# Altium PCB tarjeta v2.PcbDoc
Units mil, origin at the board's own origin, x right, y up, seen from the top; angles counter-clockwise.
Board outline 3450 x 3100 mil, 2 copper layers (Top Layer, Bottom Layer); 49 components, 32 nets, 143 pads, 0 vias.
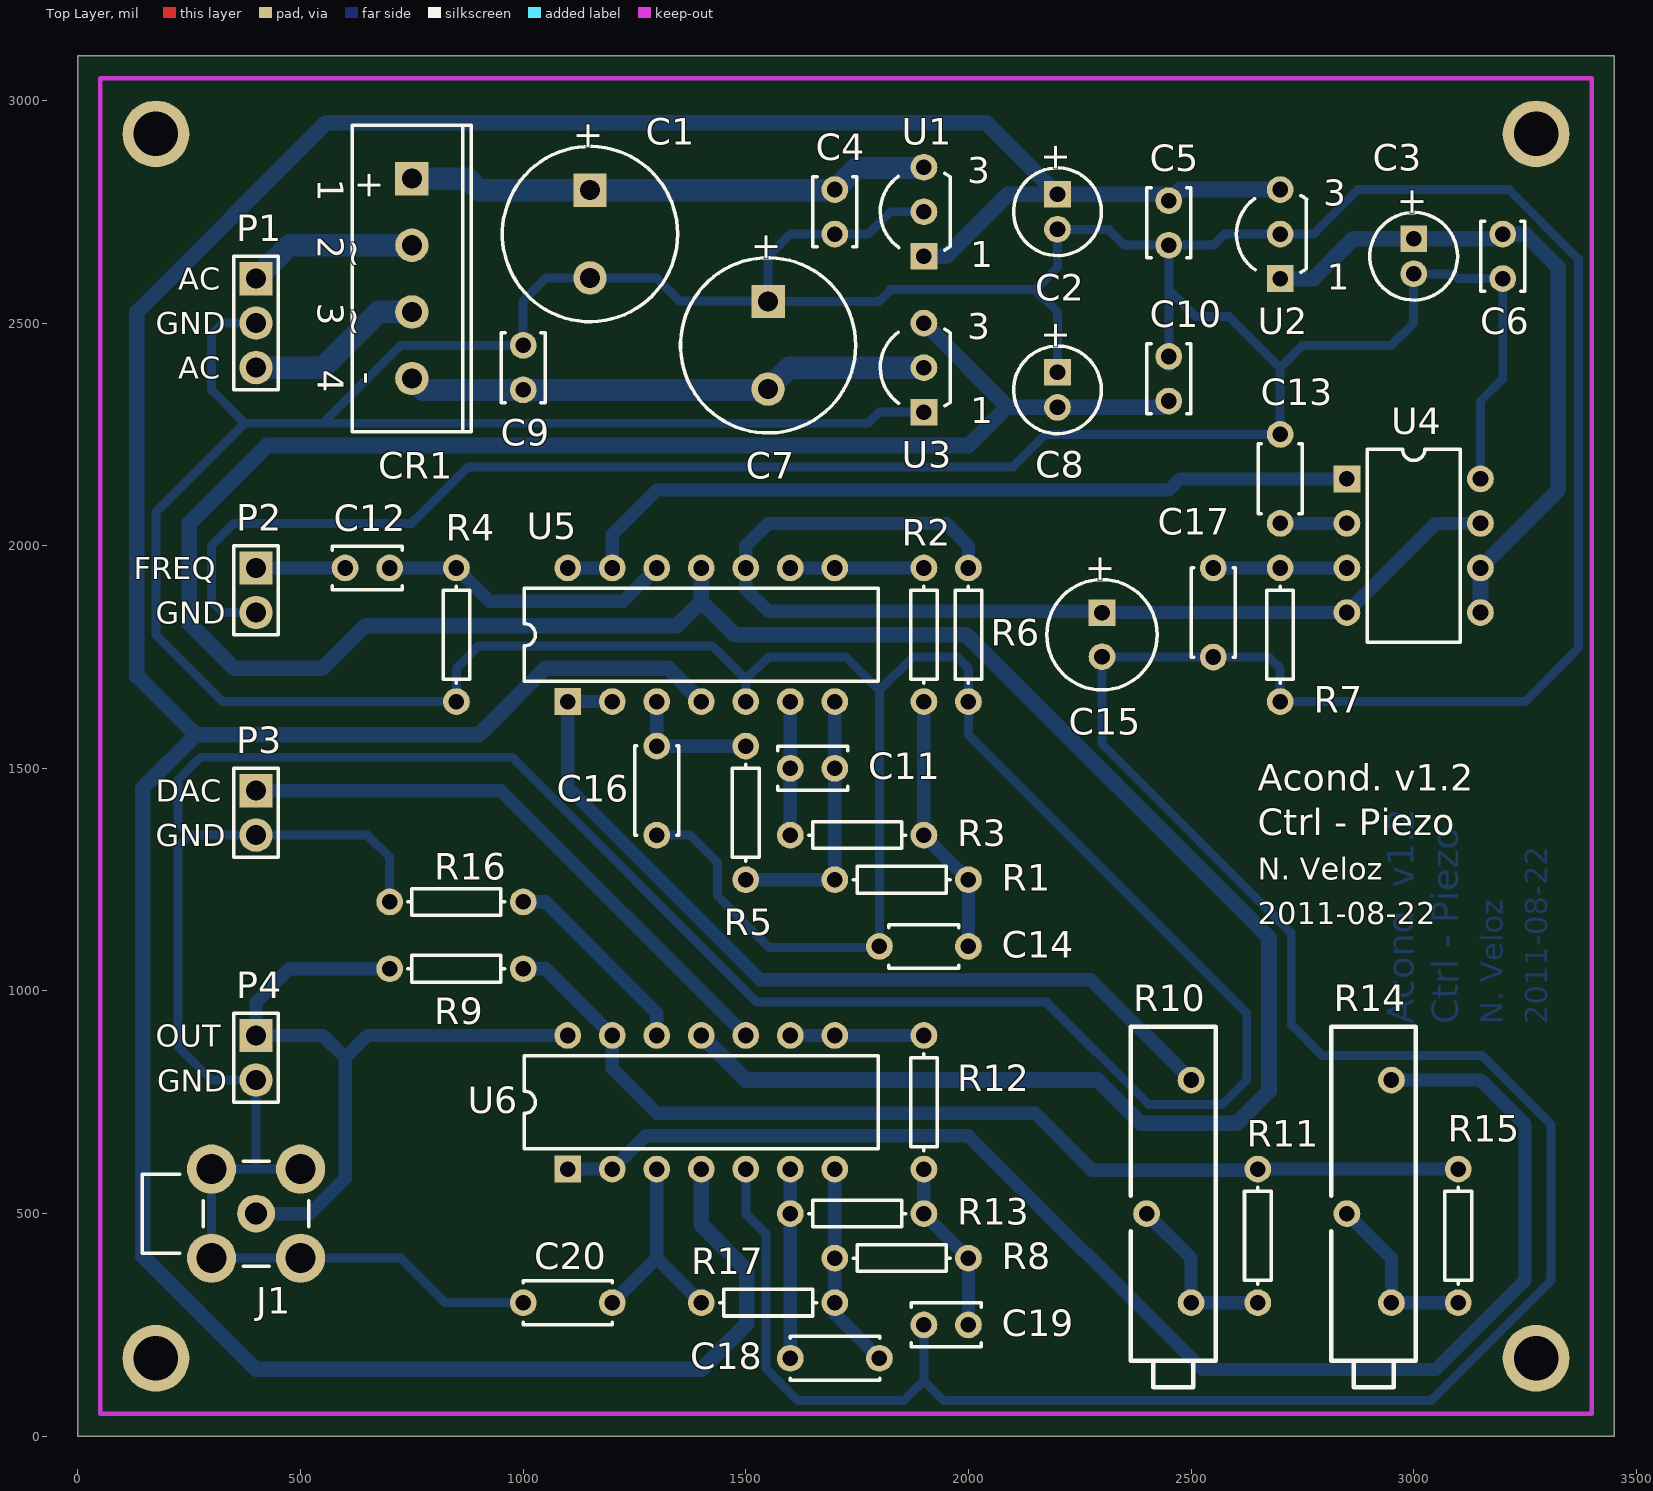
[diagram p0: Top Layer view]
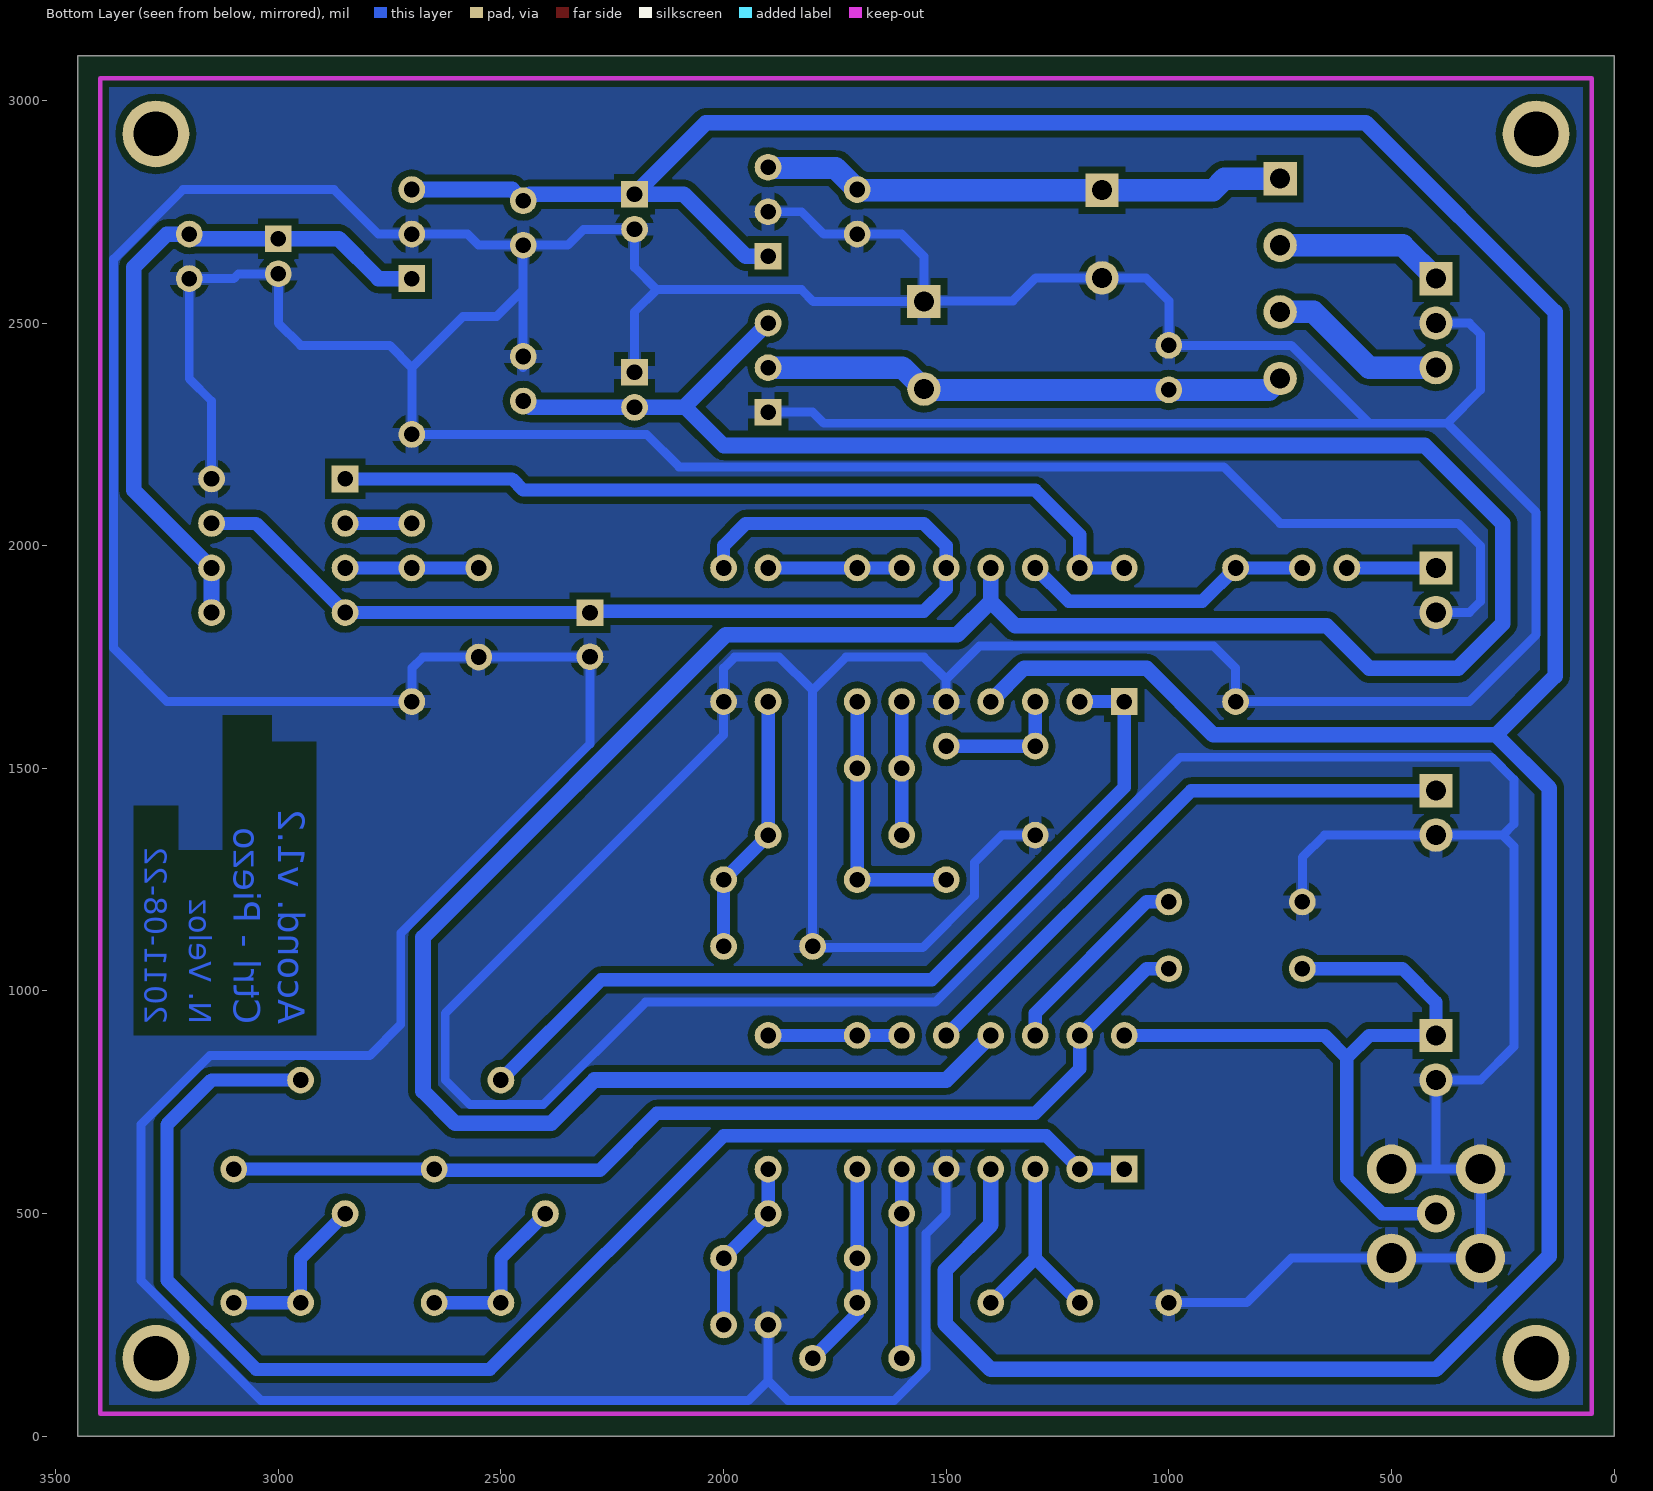
[diagram p1: Bottom Layer view, seen from below]

## Layer stack, top to bottom
Top Layer: signal copper 1.4
Dielectric: dielectric 12.6, FR-4, Dk 4.8
Bottom Layer: signal copper 1.4

## Board outline
3450,3100 0,3100 0,0 3450,0

## Design rules (kind name [scope] priority, off if disabled: settings)
Clearance Clearance_GND [InNet('GND')] p1: gap=15
Clearance [All] p2: gap=20
HoleSize [All] p1: absolutevalues=TRUE maxlimit=100 minlimit=35 maxpercent=80.000 minpercent=20.000
MinimumAnnularRing [All] p1: minimumring=12
PlaneClearance [All] p1: clearance=15
PlaneConnect [All] p1: planeconnectstyle=Relief reliefexpansion=20 reliefentries=4 reliefconductorwidth=30 reliefairgap=10
PolygonConnect [All] p1: connectstyle=Relief reliefconductorwidth=30 reliefentries=4 polygonreliefangle="90 Angle"
RoomDefinition esquematico [InComponentClass('esquematico')] p1: confinementstyle=ConfineIn formatcopy=TRUE lockcomponents=FALSE outline 50,50 3400,50 3400,3050 50,3050
RoutingLayers [All] p1: top layer_v5=FALSE bottom layer_v5=TRUE
RoutingVias [All] p1: holewidth=28 width=50 viastyle="Through Hole" minholewidth=28 minwidth=50 maxholewidth=28 maxwidth=50
SilkscreenOverComponentPads [All] p1: minsilkscreentomaskgap=5
SolderMaskExpansion [All] p1: expansion=4
TestPointUsage [All] p1: valid=0 allowmultiple=FALSE
Testpoint [All] p1: side=15 testpointundercomponent=TRUE minsize=40 maxsize=100 preferedsize=60 minholesize=0 maxholesize=40 preferedholesize=32 testpointgrid=1 style=1023 order=0123456789
Width Width_Power [InNetClass('PowerNets')] p1: maxlimit=35 minlimit=35 preferedwidth=35
Width Width_GND [InNet('GND')] p2: maxlimit=20 minlimit=10 preferedwidth=10
Width Width_HV [InNetClass('HighVoltageNets')] p3: maxlimit=50 minlimit=50 preferedwidth=50
Width [All] p4: maxlimit=30 minlimit=30 preferedwidth=30
19 further rules are at their usual default settings.

## Classes and differential pairs
net class GNDNet: GND
net class HighVoltageNets: NetC1_1 NetC7_2 NetCR1_2 NetCR1_3
net class PowerNets: +5V +12V -12V

## Components (designator, comment, footprint, x,y, rotation, side; value= is the part's Value field where it differs from the comment)
C1 "Cap Pol1" CAPPR5-10x20/H1.1 1150,2700 r270 top
C2 "Cap Pol1" CAPPR2-5x11 2200,2750 r270 top
C3 "Cap Pol1" CAPPR2-5x11 3000,2650 r270 top
C4 "Cap" CAPR2.54-4x2.5 1700,2750 r270 top
C5 "Cap" CAPR2.54-4x2.5 2450,2725 r270 top
C6 "Cap" CAPR2.54-4x2.5 3200,2650 r270 top
C7 "Cap Pol1" CAPPR5-10x20/H1.1 1550,2450 r270 top
C8 "Cap Pol1" CAPPR2-5x11 2200,2350 r270 top
C9 "Cap" CAPR2.54-4x2.5 1000,2400 r90 top
C10 "Cap" CAPR2.54-4x2.5 2450,2375 r90 top
C11 "Cap" CAPR2.54-4x2.5 1650,1500 r180 top
C12 "Cap" CAPR2.54-4x2.5 650,1950 r180 top
C13 "Cap" CAPR5.08-4x2.5 2700,2150 r270 top
C14 "Cap" CAPR5.08-4x2.5 1900,1100 r180 top
C15 "Cap Pol1" CAPPR2.5-6.3x11 2300,1800 r270 top
C16 "Cap" CAPR5.08-5.1x2.5 1300,1450 r90 top
C17 "Cap" CAPR5.08-5.1x2.5 2550,1850 r90 top
C18 "Cap" CAPR5.08-5.1x2.5 1700,175 r180 top
C19 "Cap" CAPR2.54-4x2.5 1950,250 r180 top
C20 "Cap" CAPR5.08-5.1x2.5 1100,300 r0 top
CR1 "2KBP005" D-44 750,2600 r270 top
J1 "COAX-F" MCX5.08-H5 400,500 r0 top
P1 "Header 3" HDR1X3 400,2600 r270 top
P2 "Header 2" HDR1X2 400,1950 r270 top
P3 "Header 2" HDR1X2 400,1450 r270 top
P4 "Header 2" HDR1X2 400,900 r270 top
R1 "Res1" AXIAL-0.3 1850,1250 r180 top
R2 "Res1" AXIAL-0.3 1900,1800 r270 top
R3 "Res1" AXIAL-0.3 1750,1350 r180 top
R4 "Res1" AXIAL-0.3 850,1800 r90 top
R5 "Res1" AXIAL-0.3 1500,1400 r90 top
R6 "Res1" AXIAL-0.3 2000,1800 r90 top
R7 "Res1" AXIAL-0.3 2700,1800 r90 top
R8 "Res1" AXIAL-0.3 1850,400 r180 top
R9 "Res1" AXIAL-0.3 850,1050 r180 top
R10 "RTrimPot" 3006P 2500,300 r270 top
R11 "Res1" AXIAL-0.3 2650,450 r90 top
R12 "Res1" AXIAL-0.3 1900,750 r270 top
R13 "Res1" AXIAL-0.3 1750,500 r180 top
R14 "RTrimPot" 3006P 2950,300 r270 top
R15 "Res1" AXIAL-0.3 3100,450 r90 top
R16 "Res1" AXIAL-0.3 850,1200 r0 top
R17 "Res1" AXIAL-0.3 1550,300 r180 top
U1 "MC78L12ACP" BCY-W3/W 1900,2750 r0 top
U2 "MC78L05ACP" BCY-W3/W 2700,2700 r0 top
U3 "MC79L12ACP" BCY-W3/W 1900,2400 r0 top
U4 "LM2907P" P008 3000,2000 r270 top
U5 "TL084CN" DIP14 1400,1800 r0 top
U6 "TL084CN" DIP14 1400,750 r0 top

## Footprints (in the part's own frame and the unit in brackets; to place one, negate y for a bottom-side part, rotate by r counter-clockwise, add the part's x,y. Pads: shape width x height; smd on the part's side, far side on the other; paste and mask are expansions set on the pad)
3006P [mil] "Rectangular Trimming Potentiometer 3006P"
  round 60 hole 35: 1(-500,0) 2(-200,-100) 3(0,0)
  silkscreen extent -620,-135 190,55
AXIAL-0.3 [mil] "Resistor; 2 Leads"
  round 60 hole 35: 1(-150,0) 2(150,0)
  silkscreen extent -109,-30 109,30
BCY-W3/W [mil] "TO, Flat Index; 3 In-Line, Axial Leads (Wide Pitch); Body Dia. 4.7mm; Leads 0.56 x 0.51 mm (max)"
  rect 60x60 hole 35: 1(0,-100)
  round 60 hole 35: 2(0,0) 3(0,100)
  silkscreen extent -98,-86 59,86
CAPPR2-5x11 [mil] "Capacitor, Electrolytic, Radial; Body 5 x 11 mm (Dia.xH typ); Pin Spacing 2 mm (typ)"
  rect 60x60 hole 35: 1(-39.37,0)
  round 60 hole 35: 2(39.37,0)
  silkscreen extent -98,-98 98,98
CAPPR2.5-6.3x11 [mil] "Capacitor, Electrolytic, Radial; Body 6.3 x 11 mm (Dia.xH typ); Pin Spacing 2.5 mm (typ)"
  rect 60x60 hole 35: 1(-49.21,0)
  round 60 hole 35: 2(49.21,0)
  silkscreen extent -124,-124 124,124
CAPPR5-10x20/H1.1 [mil] "Capacitor, Electrolytic, Radial; Body 10 x 20 mm (Dia.xH typ); Pin Spacing 5 mm (typ)"
  rect 75x75 hole 45: 1(-98.43,0)
  round 75 hole 45: 2(98.43,0)
  silkscreen extent -197,-197 197,197
CAPR2.54-4x2.5 [mil] "Capacitor, Ceramic, Thru-Hole, Dipped Radial; Body 4 x 2.5 mm (WxT) Pin Spacing 2.54 mm (typ)"
  round 60 hole 35: 1(-50,0) 2(50,0)
  silkscreen extent -79,-49 79,49
CAPR5.08-4x2.5 [mil] "Capacitor, Ceramic, Thru-Hole, Dipped Radial; Body 4 x 2.5 mm (WxT) Pin Spacing 5.08 mm (typ)"
  round 60 hole 35: 1(-100,0) 2(100,0)
  silkscreen extent -79,-49 79,49
CAPR5.08-5.1x2.5 [mil] "Capacitor, Ceramic, Thru-Hole, Dipped Radial; Body 5.1 x 2.5 mm (WxT) Pin Spacing 5.08 mm (typ)"
  round 60 hole 35: 1(-100,0) 2(100,0)
  silkscreen extent -100,-49 100,49
D-44 [mil] "SIP; 4 Leads; Body 15 x 17.5 x 6.8 mm (typ); Pitch 3.8 mm"
  rect 75x75 hole 45: 1(-224.41,0)
  round 75 hole 45: 2(-74.8,0) 3(74.8,0) 4(224.41,0)
  silkscreen extent -344,-134 344,134
DIP14 [mil] "DIP; 14 Leads; Row Spacing 7.62 mm; Pitch 2.54 mm"
  rect 60x60 hole 35: 1(-300,-150)
  round 60 hole 35: 2(-200,-150) 3(-100,-150) 4(0,-150) 5(100,-150) 6(200,-150) 7(300,-150) 8(300,150) 9(200,150) 10(100,150) 11(0,150) 12(-100,150) 13(-200,150) 14(-300,150)
  silkscreen extent -398,-104 398,104
HDR1X2 [mil] "Connector; Header; 2 Position"
  rect 75x75 hole 45: 1(0,0)
  round 75 hole 45: 2(100,0)
  silkscreen extent -50,-50 150,50
HDR1X3 [mil] "Connector; Header; 3 Position"
  rect 75x75 hole 45: 1(0,0)
  round 75 hole 45: 2(100,0) 3(200,0)
  silkscreen extent -50,-50 250,50
MCX5.08-H5 [mm] "Connector; RF Coaxial, MCX, Thru-Hole; 5 Position; Right-Angle"
  round 2.159 hole 1.27: 1(0,0)
  round 2.8 hole 1.7: 2(-2.54,-2.54) 3(2.54,-2.54) 4(2.54,2.54) 5(-2.54,2.54)
  silkscreen extent -6.5,-3 3,3
P008 [mil] "DIP; 8 Leads; Row Spacing 7.62 mm; Pitch 2.54 mm"
  rect 60x60 hole 35: 1(-150,-150)
  round 60 hole 35: 2(-50,-150) 3(50,-150) 4(150,-150) 5(150,150) 6(50,150) 7(-50,150) 8(-150,150)
  silkscreen extent -217,-104 217,104

## Part data
C1 C2 C3 C7 C8 C15: "Polarized Capacitor (Radial)"
C4 C5 C6 C9 C10 C11 C12 C13 C14 C16 C17 C18 C19 C20: "Capacitor"
CR1: "2 Amp Single Phase Rectifier Bridge"
J1: "RF Coaxial PCB Connector, MCX; Thru-Hole, Right-Angle Mount Socket, Blunt Post Terminal, 50 Ohm Impedance"
P1: "Header, 3-Pin"
P2 P3 P4: "Header, 2-Pin"
R1 R2 R3 R4 R5 R6 R7 R8 R9 R11 R12 R13 R15 R16 R17: "Resistor"
R10 R14: "Rectangular Trimmer Potentiometer"
U1 U2: "Three-Terminal Low Current Positive Voltage Regulator"
U3: "Three-Terminal Low Current Negative Voltage Regulator"
U4: "Frequency-To-Voltage Converters"
U5 U6: "General-Purpose J-FET Quad Operational Amplifier"

## Free pads (board coordinates)
  round 150 hole 100: 0(175,175) 0(175,2925) 0(3275,175) 0(3275,2925)

## Nets (pads, with @x,y where several pads share a name; then routed paths per layer and width w, separated by ;. In a path a pad name is that pad's centre, name@x,y a point inside that pad or via, vN(x,y) a via of type N, cw(c..) or ccw(c..) an arc to the next point about the centre after c; other vN are vias at no path point)
+5V: C3.1 C6.1 U2.1 U4.5 U4.6 | length 1545
  Bottom Layer w35: U2.1 2775,2600 2864.37,2689.37 C3.1 3189.37,2689.37 C6.1 3250,2700 3325,2625 3325,2125 U4.6 U4.5
+12V: C2.1 C5.1 U1.1 U2.3 U5.4 U6.4 | length 8532.1
  Bottom Layer w35: U6.4 1400,475 1502.5,372.5 1502.5,252.5 1400,150 400,150 145.46,404.54 145.46,1455.56 264.9,1575 ; U5.4 1325,1725 1050,1725 900,1575 264.9,1575 ; U1.1 1950,2650 2089.37,2789.37 C2.1 ; U2.3 2475,2800 C5.1 2435.63,2789.37 C2.1 ; 264.9,1575 132.5,1707.4 132.5,2525 557.5,2950 2039.37,2950 C2.1
-12V: C8.2 C10.1 U3.3 U5.11 U6.11 | length 7479.8
  Bottom Layer w35: U6.11 1500,800 2289.9,800 2387.4,702.5 2602.5,702.5 2675,775 2675,1120 1995,1800 1475,1800 1400,1875 ; U5.11@1400,1925 U5.11 1400,1875 ; U3.3 2089.37,2310.63 ; C10.1 2435.63,2310.63 C8.2 2089.37,2310.63 ; 1400,1875 1345,1820 645,1820 550,1725 350,1725 250,1825 250,2050 425,2225 2000,2225 2085.63,2310.63 2089.37,2310.63
GND: C1.2 C2.2 C3.2 C4.2 C5.2 C6.2 C7.1 C8.1 C9.2 C10.2 C13.1 C14.2 C15.2 C16.1 C17.1 C19.2 C20.1 J1.2 J1.3 J1.4 J1.5 P1.2 P2.2 P3.2 P4.2 R4.1 R6.1 R7.1 R16.1 U1.2 U2.2 U3.1 U4.8 U5.5 U6.5 | length 27716.6
  Bottom Layer w20: P4.2@400,775 400,600 ; P4.2 300,800 225,875 225,1325 250,1350 ; P2.2 325,1850 300,1875 300,2000 350,2050 750,2050 876.94,2176.94 1450,2176.94 2100,2176.94 2173.06,2250 C13.1 2700,2400 ; P1.2 325,2500 300,2475 300,2350 375,2275 ; J1.4 400,600 ; R16.1 700,1300 650,1350 P3.2 250,1350 ; C20.1 825,300 725,400 J1.3 J1.2 J1.5 400,600 ; C16.1 1375,1350 1436.76,1288.24 1436.76,1213.24 1552.56,1097.44 1797.44,1097.44 C14.2 1800,1675 ; U6.5 1500,500 1545,455 1545,152.22 1617.22,80 1855,80 1900,125 ; U5.5 1500,1700 ; C7.1 1798.43,2548.43 1825,2575 2150,2575 ; C19.2 1900,125 ; U3.1 1800,2300 1775,2275 550,2275 ; U1.2 1825,2750 1775,2700 1650,2700 1600,2700 1550,2650 1550,2551.57 1548.43,2550 1350,2550 1298.43,2601.57 C1.2 1051.57,2601.57 1000,2550 C9.2 725,2450 550,2275 ; C8.1 2200,2525 2150,2575 ; C10.2@2450,2400 C10.2 2450,2575 ; U4.8 3150,2325 3200,2375 C6.2 3100,2600 3089.37,2610.63 C3.2 3000,2500 2950,2450 2750,2450 2700,2400 ; 250,1350 225,1375 225,1475 275,1525 975,1525 1525,975 2175,975 2405,745 2570,745 2625,800 2625,950 2000,1575 R6.1 2000,1725 1975,1750 1875,1750 1800,1675 ; 375,2275 175,2075 175,1800 325,1650 R4.1 850,1725 900,1775 1425,1775 1500,1700 ; 375,2275 550,2275 ; 1500,1700 1550,1750 1725,1750 1800,1675 ; 1900,125 1945,80 3038.58,80 3308.58,350 3308.58,700 3153.58,855 2795,855 2725,925 2725,1130.1 2300,1555.1 C15.2 2300.79,1750 C17.1 2675,1750 2700,1725 R7.1 3250,1650 3370,1770 3370,2643.64 3213.64,2800 2875,2800 2775,2700 U2.2 2575,2700 2550,2675 C5.2 ; 2150,2575 2200,2625 C2.2 2314.37,2710.63 2350,2675 C5.2 ; 2450,2575 C5.2 ; 2450,2575 2510.39,2514.61 2585.39,2514.61 2700,2400
NetC1_1: C1.1 C4.1 CR1.1 U1.3 | length 1184.7
  Bottom Layer w50: CR1.1 875,2824.41 900.98,2798.43 C1.1 ; C1.1@1151.57,2798.43 C1.1 ; U1.3 1900,2848.33 1748.33,2848.33 C4.1 1698.43,2798.43 C1.1
NetC7_2: C7.2 C9.1 CR1.4 U3.2 | length 1181.3
  Bottom Layer w50: CR1.4 775.59,2350 C9.1 1548.43,2350 C7.2 1598.43,2400 U3.2
NetC11_1: C11.1 R1.2 R5.1 U5.7 | length 600
  Bottom Layer w30: R5.1 R1.2 C11.1 U5.7
NetC11_2: C11.2 R3.2 U5.6 | length 300
  Bottom Layer w30: R3.2 C11.2 U5.6
NetC12_1: C12.1 R4.2 U5.12 | length 662.1
  Bottom Layer w30: C12.1 R4.2 925,1875 1225,1875 U5.12
NetC12_2: C12.2 P2.1 | length 200
  Bottom Layer w30: P2.1 C12.2
NetC13_2: C13.2 U4.2 | length 150
  Bottom Layer w30: C13.2 U4.2
NetC14_1: C14.1 R1.1 R2.2 R3.1 | length 591.4
  Bottom Layer w30: R2.2 R3.1 R1.1 C14.1
NetC15_1: C15.1 R6.2 U4.4 U4.7 U5.10 | length 2443.5
  Bottom Layer w30: R6.2 2000,2000 1950,2050 1550,2050 1500,2000 U5.10 1500,1902.5 1550,1852.5 2297.5,1852.5 2300,1850 U4.4 3050,2050 U4.7
NetC16_2: C16.2 R5.2 U5.3 | length 300
  Bottom Layer w30: U5.3 C16.2 R5.2
NetC17_2: C17.2 R7.2 U4.3 | length 300
  Bottom Layer w30: C17.2 R7.2 U4.3
NetC18_1: C18.1 R8.2 R17.1 U6.7 | length 466.4
  Bottom Layer w30: U6.7 R8.2 R17.1 1700,275 C18.1
NetC18_2: C18.2 R13.2 U6.6 | length 425
  Bottom Layer w30: C18.2 R13.2 U6.6
NetC19_1: C19.1 R8.1 R12.2 R13.1 | length 391.4
  Bottom Layer w30: R12.2 R13.1 R8.1 C19.1
NetC20_2: C20.2 R17.2 U6.3 | length 482.8
  Bottom Layer w30: C20.2 1300,400 ; U6.3 1300,400 ; R17.2 1300,400
NetCR1_2: CR1.2 P1.1 | length 381
  Bottom Layer w50: P1.1 474.8,2674.8 CR1.2
NetCR1_3: CR1.3 P1.3 | length 401.9
  Bottom Layer w50: P1.3 550,2400 675.2,2525.2 CR1.3
NetP3_1: P3.1 U6.10 | length 1327.8
  Bottom Layer w30: P3.1 950,1450 U6.10
NetR2_1: R2.1 U5.8 U5.9 | length 300
  Bottom Layer w30: U5.9 U5.8 R2.1
NetR9_1: R9.1 R11.2 R15.2 U6.13 | length 2332.4
  Bottom Layer w30: R9.1 1050,1050 U6.13 1200,825 1300,725 2150,725 2277.5,597.5 2647.5,597.5 R11.2 R15.2
NetR10_2: R10.2 R10.3 R11.1 | length 391.4
  Bottom Layer w30: R10.2 2500,400 R10.3 R11.1
NetR12_1: R12.1 U6.8 U6.9 | length 300
  Bottom Layer w30: U6.9 U6.8 R12.1
NetR14_2: R14.2 R14.3 R15.1 | length 391.4
  Bottom Layer w30: R14.2 2950,400 R14.3 R15.1
NetR16_2: R16.2 U6.12 | length 453.6
  Bottom Layer w30: R16.2 1050,1200 1300,950 U6.12
NetU4_1: U4.1 U5.13 U5.14 | length 1894.5
  Bottom Layer w30: U5.14 U5.13 1200,2025 1300,2125 2450,2125 2475,2150 U4.1 U4.1@2837.44,2162.56
VDAC: R14.1 U6.1 U6.2 | length 3172.8
  Bottom Layer w30: U6.1 U6.2 1275,675 2000,675 2525,150 3050,150 3250,350 3250,700 3150,800 R14.1
VFO: R10.1 U5.1 U5.2 | length 1964.9
  Bottom Layer w30: U5.2 U5.1 1100,1457.44 1425.87,1131.57 1532.44,1025 2275,1025 R10.1
VOUT: J1.1 P4.1 R9.2 U6.14 | length 1625.8
  Bottom Layer w30: J1.1 520.38,500 600,579.62 600,850 ; P4.1 400,975 475,1050 R9.2 ; P4.1@425,900 550,900 600,850 ; U6.14 650,900 600,850

## Polygon pours and split planes (outlines as drawn)
GND on Bottom Layer "Plano de Tierra" (solid, remove dead copper, pour order 1000): 50,3050 3400,3050 3400,50 50,50

## Keep-outs
Keep-Out Layer:
  lines w10: 50,50 3400,50 3400,3050 50,3050 50,50

## Other copper
Bottom Layer:
  text "Acond. v1.2" at 3000,925 h60 r90
  text "Ctrl - Piezo" at 3100,925 h60 r90
  text "N. Veloz" at 3200,925 h50 r90
  text "2011-08-22" at 3300,925 h50 r90

## Silkscreen, mask and mechanical layers (free items; w line width, h text height)
Top Overlay:
  text "AC" at 225,2575 h50
  text "GND" at 175,2475 h50
  text "AC" at 225,2375 h50
  text "FREQ" at 125,1925 h50
  text "GND" at 175,1825 h50
  text "Acond. v1.2" at 2650,1450 h60
  text "DAC" at 175,1425 h50
  text "Ctrl - Piezo" at 2650,1350 h60
  text "GND" at 175,1325 h50
  text "N. Veloz" at 2650,1250 h50
  text "2011-08-22" at 2650,1150 h50
  text "OUT" at 175,875 h50
  text "GND" at 178.24,773.52 h50

## Text inside footprints (layer, text, board x,y; h text height)
C1: Top Overlay "+" at 1120.47,2954.92 h59.05 r270
C2: Top Overlay "+" at 2170.47,2906.5 h59.05 r270
C3: Top Overlay "+" at 2970.47,2806.5 h59.05 r270
C7: Top Overlay "+" at 1520.47,2704.92 h59.05 r270
C8: Top Overlay "+" at 2170.47,2506.5 h59.05 r270
C15: Top Overlay "+" at 2270.47,1982.09 h59.06 r270
CR1: Top Overlay "-" at 624.41,2390.55 h59.06 r270; Top Overlay "+" at 628.74,2843.31 h59.06 r270; Top Overlay "~" at 594.88,2537.01 h59.06 r270; Top Overlay "~" at 594.88,2689.37 h59.06 r270; Top Overlay "1" at 538.19,2824.41 h59.06 r270; Top Overlay "2" at 538.19,2694.8 h59.06 r270; Top Overlay "3" at 538.19,2545.2 h59.06 r270; Top Overlay "4" at 538.19,2395.59 h59.06 r270
U1: Top Overlay "1" at 2004.33,2625.2 h59.05; Top Overlay "3" at 1997.24,2813.78 h59.05
U2: Top Overlay "3" at 2797.24,2763.78 h59.05; Top Overlay "1" at 2804.33,2575.2 h59.05
U3: Top Overlay "1" at 2004.33,2275.2 h59.05; Top Overlay "3" at 1997.24,2463.78 h59.05